# Altium PCB BMS_slave.PcbDoc (part 4 of 5)
Units mm, origin at the board's own origin, x right, y up, seen from the top; angles counter-clockwise.
Board outline 124.71 x 100.58 mm, 4 copper layers (Layer 1 - Top Layer, Layer 2 - GND, Layer 3 - Signal, Layer 4 - Bottom Layer), stack 1.56 mm thick; 370 components, 202 nets, 969 pads, 371 vias.
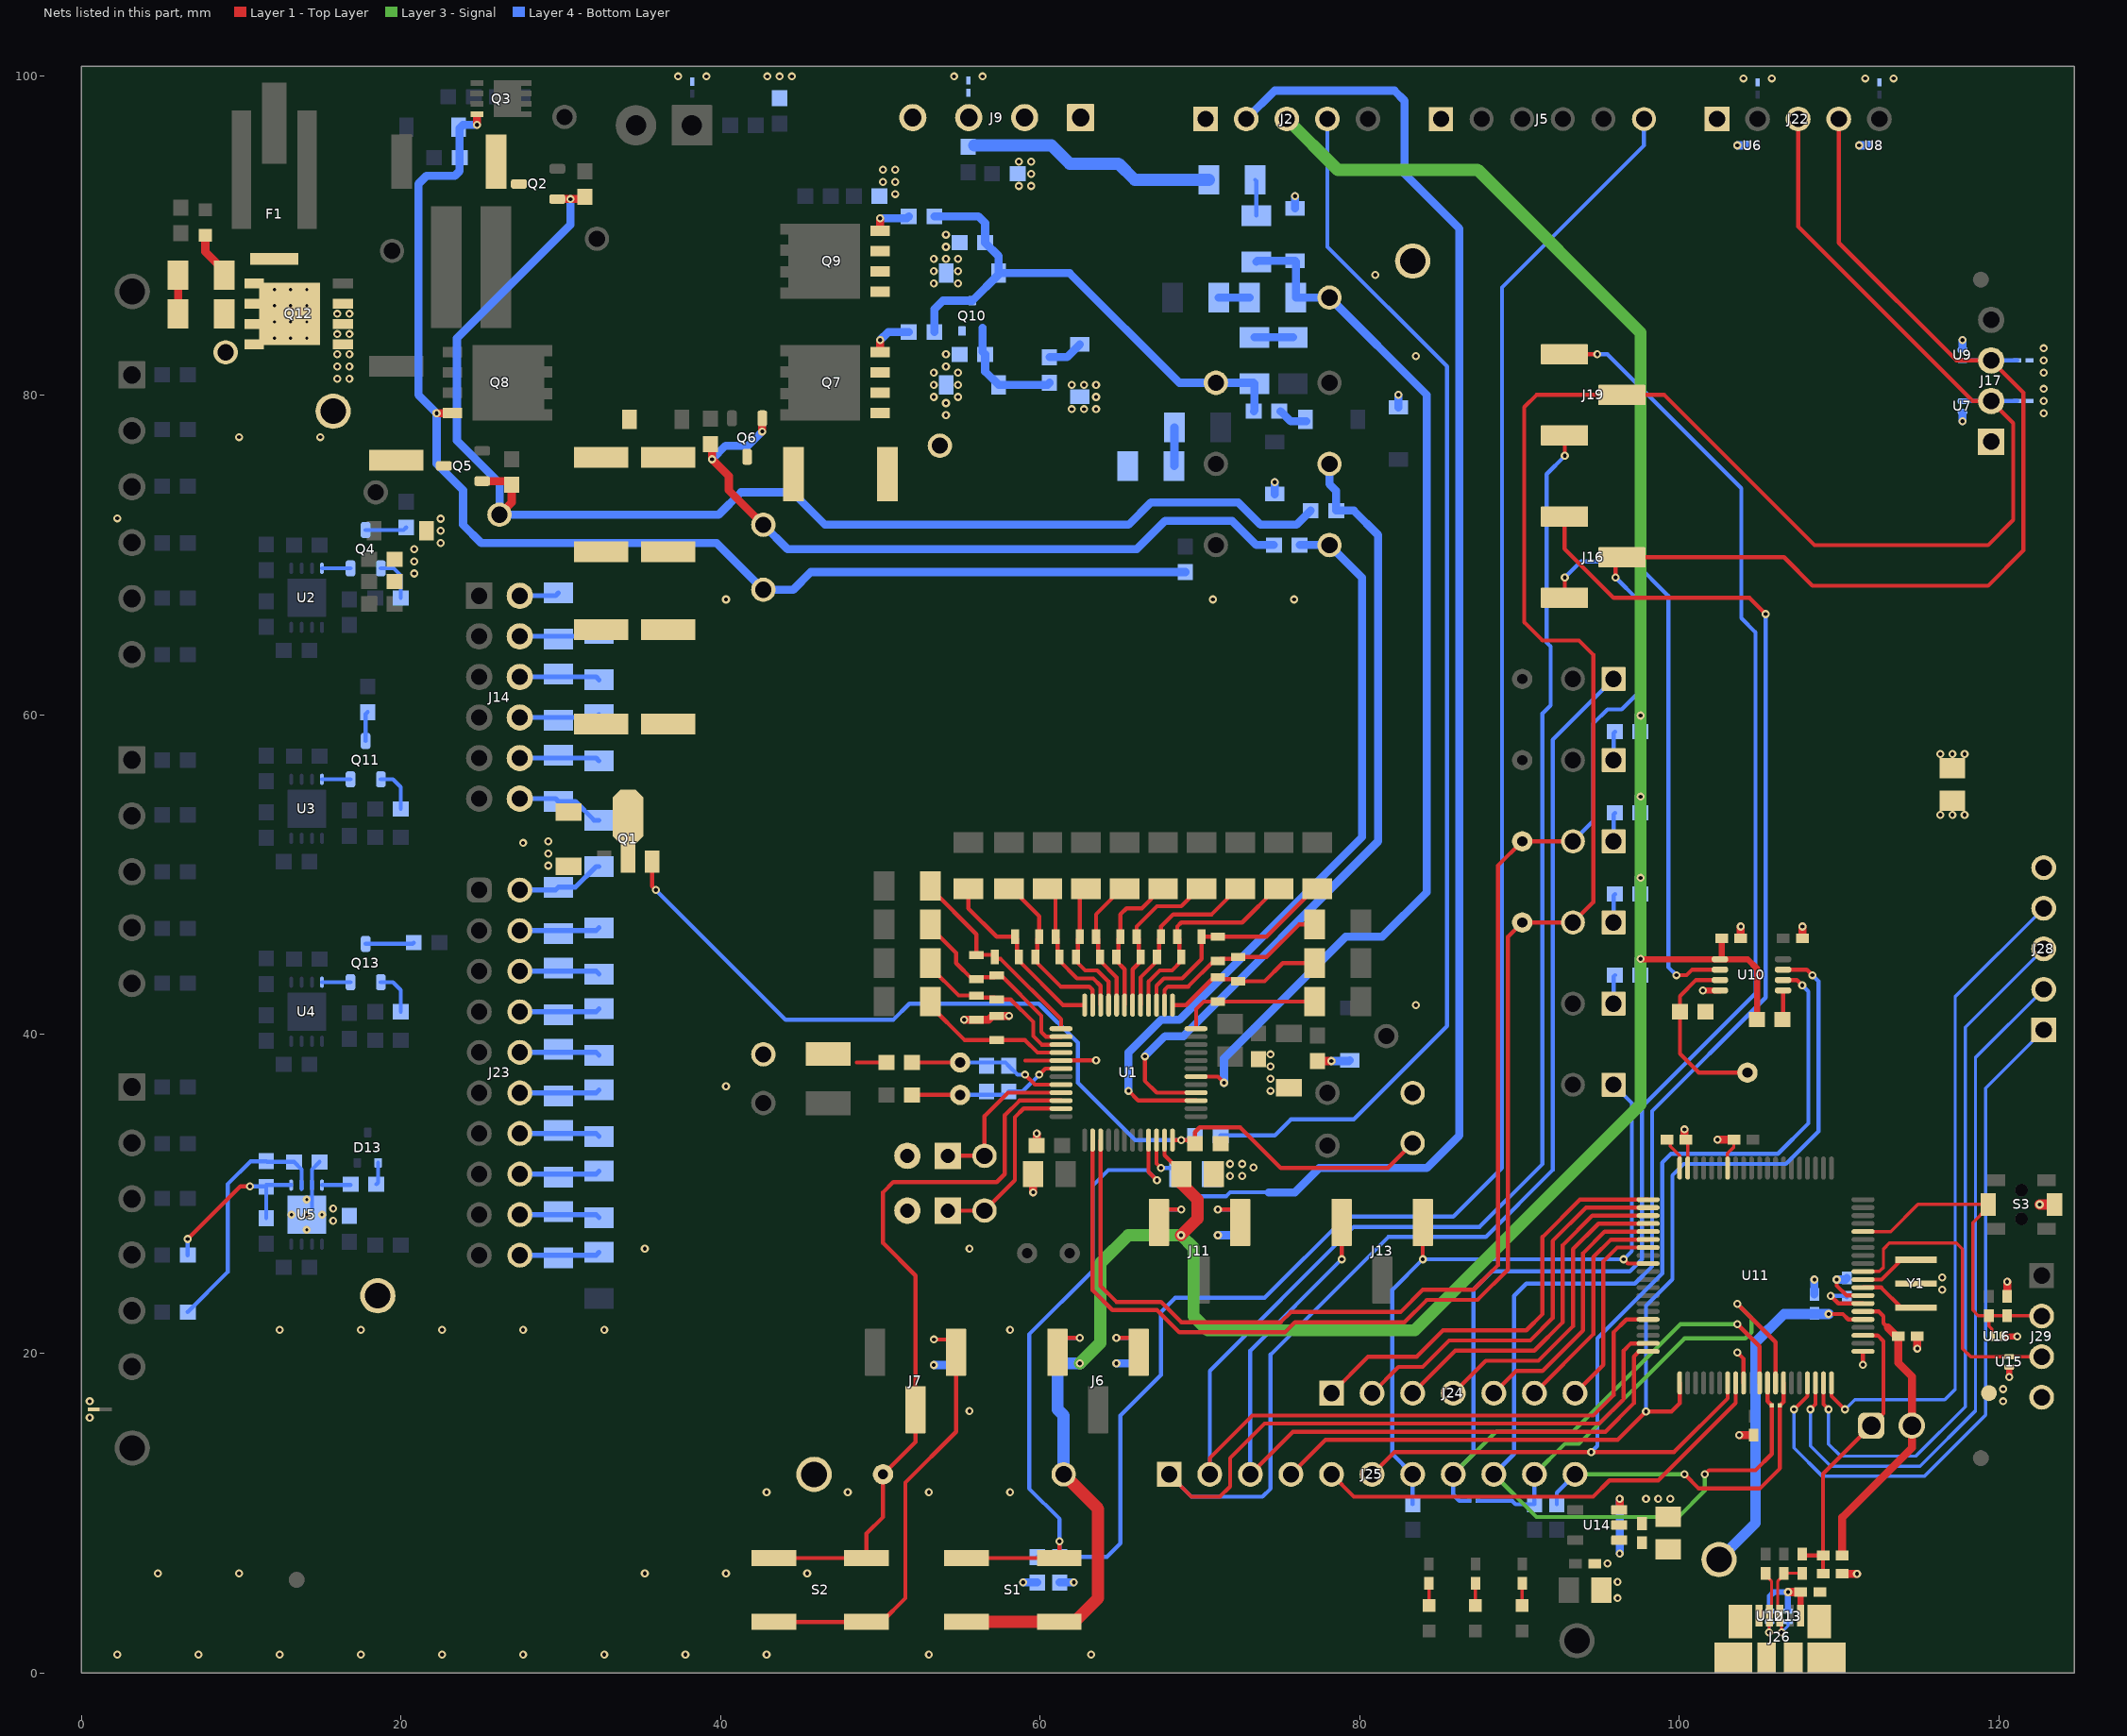
[diagram p5: the nets of this part, all layers, seen from the top]

## Via types
v1: diameter 0.508, hole 0.254, Layer 1 - Top Layer to Layer 4 - Bottom Layer, tented both sides, 339 vias
v2: diameter 0.5, hole 0.2, Layer 1 - Top Layer to Layer 4 - Bottom Layer, tented both sides, 32 vias

## Nets (pads, with @x,y where several pads share a name; then routed paths per layer and width w, separated by ;. In a path a pad name is that pad's centre, name@x,y a point inside that pad or via, vN(x,y) a via of type N, cw(c..) or ccw(c..) an arc to the next point about the centre after c; other vN are vias at no path point) (continued)
NetC55_1: C55.1 C56.2 R85.2 U5.5 | length 10.8
  Layer 1 - Top Layer w0.254: v1(6.642,27.178) 9.944,30.48 v1(10.541,30.48)
  Layer 4 - Bottom Layer w0.254: R85.2@6.642,26.162 v1(6.642,27.178) ; v1(10.541,30.48) 11.519,30.48 C56.2@11.557,30.442 C55.1@11.557,28.486 ; C56.2@11.557,30.552 U5.5@13.122,30.552
NetC56_1: C56.1 C57.2 R86.2 U5.6 | length 15.7
  Layer 4 - Bottom Layer w0.254: R86.2@6.642,22.606 9.144,25.108 9.144,30.607 10.579,32.042 C56.1@11.557,32.042 11.595,32.004 C57.2@13.297,32.004 13.772,31.529 U5.6@13.772,30.328
NetC61_1: C61.1 U11.20 | length 2.1
  Layer 1 - Top Layer w0.203: C61.1@99.222,33.401 99.441,33.182 99.441,32.973 100.025,32.389 U11.20@100.025,31.617
NetC67_1: C67.1 U11.67 | length 3.3
  Layer 1 - Top Layer w0.254: v1(109.474,23.622) 109.954,23.142 U11.67@111.5,23.142
  Layer 4 - Bottom Layer w0.254: v1(109.474,23.622) 110.398,23.622 C67.1@110.49,23.53
NetC71_1: C71.1 Q1.2 Q1.4 R9.1 R10.1
NetD1_1: D1.1 R1.2 | length 2.1
  Layer 1 - Top Layer w0.508: R1.2@77.343,38.316 v1(78.232,38.316)
  Layer 4 - Bottom Layer w0.508: v1(78.232,38.316) 79.324,38.316 D1.1@79.375,38.368
NetD2_1: D2.1 R5.2 R6.2
NetD3_1: D3.1 R45.2 | length 3
  Layer 1 - Top Layer w0.508: D3.1@7.747,90.005 7.747,88.974 8.943,87.778 R45.2@8.943,87.503
NetD4_1: D4.1 Q3.4 Q8.4 R50.2 R61.2 TP25.1 | length 78.2
  Layer 1 - Top Layer w0.508: v1(22.225,78.867) Q8.4@23.21,78.867 ; v1(24.751,96.915) Q3.4@24.751,97.485
  Layer 4 - Bottom Layer w0.508: v1(24.751,96.915) 23.876,96.915 23.66,96.698 R50.2@23.66,94.869 23.66,94.018 23.368,93.726 21.59,93.726 21.082,93.218 21.082,80.01 v1(22.225,78.867) 22.225,75.701 23.876,74.05 23.876,71.882 25.019,70.739 39.751,70.739 TP25.1@42.672,67.818 44.539,67.818 45.644,68.923 R61.2@69.088,68.923
NetD5_1: D5.1 Q10.3 R51.2 R55.2 R56.2 R64.2 R65.2 TP28.1 | length 33.9
  Layer 4 - Bottom Layer w0.508: R55.2@53.378,83.947 53.378,85.382 53.909,85.913 Q10.3@55.753,85.913 57.391,87.551 D5.1@57.391,87.63 ; R56.2@53.378,91.186 56.134,91.186 56.553,90.767 R51.2@56.553,89.535 57.391,88.698 D5.1@57.391,87.63 ; R65.2@73.368,78.994 73.406,79.032 R64.2@73.406,80.719 73.353,80.772 TP28.1@70.993,80.772 68.707,80.772 61.849,87.63 D5.1@57.391,87.63
NetD6_1: D6.1 Q10.1 R52.2 R57.1 | length 7.2
  Layer 4 - Bottom Layer w0.508: Q10.1@56.403,84.201 56.403,82.7 R52.2@56.553,82.55 56.553,81.483 D6.1@57.391,80.645 60.452,80.645 R57.1@60.579,80.772
NetD7_1: D7.1 R57.2 | length 2.2
  Layer 4 - Bottom Layer w0.508: R57.2@60.579,82.372 61.685,82.372 D7.1@62.484,83.171
NetD9_2: D9.2 R65.1 | length 1.9
  Layer 4 - Bottom Layer w0.508: R65.1@75.042,78.994 75.677,78.359 D9.2@76.669,78.359
NetD13_1: D13.1 R82.2 | length 1.4
  Layer 4 - Bottom Layer w0.254: R82.2@18.453,30.607 18.557,30.711 D13.1@18.557,31.943
NetD14_2: D14.2 R120.1 | length 1.4
  Layer 1 - Top Layer w0.203: D14.2@84.328,4.229 R120.1@84.328,5.623
NetD15_2: D15.2 R121.1 | length 1.4
  Layer 1 - Top Layer w0.203: D15.2@87.249,4.229 R121.1@87.249,5.623
NetD16_2: D16.2 R122.1 | length 1.4
  Layer 1 - Top Layer w0.203: D16.2@90.17,4.229 R122.1@90.17,5.623
NetF1_2: F1.2 Q12.5 Q12.6 Q12.7 Q12.8 Q12.9 R48.1 TP24.1
  other v2: 12.065,83.566 13.081,83.566 14.097,83.566 12.065,84.582 13.081,84.582 14.097,84.582 12.065,85.598 13.081,85.598 14.097,85.598 12.065,86.614 13.081,86.614 14.097,86.614
NetJ2_4: J2.4 R15.2 | length 76.9
  Layer 4 - Bottom Layer w0.254: R15.2@71.285,33.655 74.676,33.655 75.692,34.671 79.629,34.671 85.471,40.513 85.471,81.788 77.978,89.281 J2.4@77.978,97.282
NetJ6_1: J6.1 R25.2 | length 2.8
  Layer 1 - Top Layer w0.254: J6.1@61.087,20.866 61.214,20.993 v1(62.484,20.993)
  Layer 4 - Bottom Layer w0.254: R25.2@61.087,20.993 v1(62.484,20.993)
NetJ6_3: J6.3 R26.2 | length 2.8
  Layer 1 - Top Layer w0.254: v1(64.77,20.993) 66.04,20.993 J6.3@66.167,20.866
  Layer 4 - Bottom Layer w0.254: v1(64.77,20.993) R26.2@66.167,20.993
NetJ7_3: J7.3 R29.2 S2.1 S2.2 | length 28.7
  Layer 1 - Top Layer w0.254: S2.2@43.328,3.207 S2.1@49.128,3.207 50.07,3.207 51.562,4.699 51.562,11.938 54.737,15.113 J7.3@54.737,20.342 ; v1(53.34,20.888) 54.61,20.888 J7.3@54.737,20.761
  Layer 4 - Bottom Layer w0.254: v1(53.34,20.888) R29.2@54.737,20.888
NetJ11_1: J11.1 R89.2 | length 3.5
  Layer 1 - Top Layer w0.254: J11.1@67.437,28.216 67.437,28.889 67.564,29.016 v1(68.834,29.016)
  Layer 4 - Bottom Layer w0.254: R89.2@67.437,29.016 v1(68.834,29.016)
NetJ11_3: J11.3 R91.2 | length 2.8
  Layer 1 - Top Layer w0.254: v1(71.12,29.016) 72.39,29.016 J11.3@72.517,28.889
  Layer 4 - Bottom Layer w0.254: v1(71.12,29.016) R91.2@72.517,29.016
NetJ12_1: J12.1 R92.2 | length 1.8
  Layer 4 - Bottom Layer w0.254: J12.1@95.885,57.15 95.885,58.839 R92.2@95.974,58.928
NetJ14_2: J14.2 R87.2 | length 2.5
  Layer 4 - Bottom Layer w0.305: J14.2@27.432,67.437 29.665,67.437 R87.2@29.845,67.617
NetJ14_4: J14.4 R87.1 R88.2 | length 5
  Layer 4 - Bottom Layer w0.305: J14.4@27.432,64.897 32.205,64.897 R88.2@32.385,65.077
NetJ14_6: J14.6 R88.1 R90.2 | length 5
  Layer 4 - Bottom Layer w0.305: J14.6@27.432,62.357 32.205,62.357 R88.1@32.385,62.177
NetJ14_8: J14.8 R90.1 R93.2 | length 5
  Layer 4 - Bottom Layer w0.305: J14.8@27.432,59.817 32.205,59.817 R93.2@32.385,59.997
NetJ14_10: J14.10 R93.1 R95.2 | length 5
  Layer 4 - Bottom Layer w0.305: J14.10@27.432,57.277 32.205,57.277 R93.1@32.385,57.097
NetJ14_12: J14.12 R95.1 R96.2 | length 5.5
  Layer 4 - Bottom Layer w0.305: J14.12@27.432,54.737 29.665,54.737 R95.1@29.845,54.557 30.914,54.557 32.078,53.393 R96.2@32.385,53.393
NetJ15_1: J15.1 R94.2 | length 1.8
  Layer 4 - Bottom Layer w0.254: J15.1@95.885,52.07 95.885,53.759 R94.2@95.974,53.848
NetJ18_1: J18.1 R97.2 | length 1.8
  Layer 4 - Bottom Layer w0.254: J18.1@95.885,46.99 95.885,48.679 R97.2@95.974,48.768
NetJ20_1: J20.1 R99.2 | length 1.8
  Layer 4 - Bottom Layer w0.254: J20.1@95.885,41.91 95.885,43.599 R99.2@95.974,43.688
NetJ23_2: J23.2 R96.1 R98.2 | length 5.6
  Layer 4 - Bottom Layer w0.305: J23.2@27.432,49.022 29.665,49.022 R98.2@29.845,49.202 30.914,49.202 32.205,50.493 R96.1@32.385,50.493
NetJ23_4: J23.4 R98.1 R100.2 | length 5
  Layer 4 - Bottom Layer w0.305: J23.4@27.432,46.482 32.205,46.482 R100.2@32.385,46.662
NetJ23_6: J23.6 R100.1 R101.2 | length 5
  Layer 4 - Bottom Layer w0.305: J23.6@27.432,43.942 32.205,43.942 R100.1@32.385,43.762
NetJ23_8: J23.8 R101.1 R102.2 | length 5
  Layer 4 - Bottom Layer w0.305: J23.8@27.432,41.402 32.205,41.402 R102.2@32.385,41.582
NetJ23_10: J23.10 R102.1 R103.2 | length 5
  Layer 4 - Bottom Layer w0.305: J23.10@27.432,38.862 32.205,38.862 R102.1@32.385,38.682
NetJ23_12: J23.12 R103.1 R104.2 | length 5
  Layer 4 - Bottom Layer w0.305: J23.12@27.432,36.322 32.205,36.322 R104.2@32.385,36.502
NetJ23_14: J23.14 R104.1 R105.2 | length 5
  Layer 4 - Bottom Layer w0.305: J23.14@27.432,33.782 32.205,33.782 R104.1@32.385,33.602
NetJ23_16: J23.16 R105.1 R106.2 | length 5
  Layer 4 - Bottom Layer w0.305: J23.16@27.432,31.242 32.205,31.242 R106.2@32.385,31.422
NetJ23_18: J23.18 R106.1 R107.2 | length 5
  Layer 4 - Bottom Layer w0.305: J23.18@27.432,28.702 32.205,28.702 R106.1@32.385,28.522
NetJ23_20: J23.20 R107.1 R108.2 | length 5
  Layer 4 - Bottom Layer w0.305: J23.20@27.432,26.162 32.205,26.162 R108.2@32.385,26.342
NetJ24_1: J24.1 U11.21 | length 27.7
  Layer 1 - Top Layer w0.254: J24.1@78.232,17.526 80.518,19.812 83.566,19.812 85.217,21.463 90.424,21.463 91.44,22.479 91.44,27.305 93.777,29.642 U11.21@98.05,29.642
NetJ24_2: J24.2 U11.22 | length 24.9
  Layer 1 - Top Layer w0.254: J24.2@80.772,17.526 82.423,19.177 83.947,19.177 85.598,20.828 90.678,20.828 92.075,22.225 92.075,27.051 94.166,29.142 U11.22@98.05,29.142
NetJ24_3: J24.3 U11.23 | length 22.2
  Layer 1 - Top Layer w0.254: J24.3@83.312,17.526 85.979,20.193 90.932,20.193 92.71,21.971 92.71,26.797 94.555,28.642 U11.23@98.05,28.642
NetJ24_4: J24.4 U11.24 | length 19.4
  Layer 1 - Top Layer w0.254: J24.4@85.852,17.526 87.884,19.558 91.186,19.558 93.345,21.717 93.345,26.543 94.944,28.142 U11.24@98.05,28.142
NetJ24_5: J24.5 U11.25 | length 16.7
  Layer 1 - Top Layer w0.254: J24.5@88.392,17.526 89.789,18.923 91.44,18.923 93.98,21.463 93.98,26.289 95.333,27.642 U11.25@98.05,27.642
NetJ24_6: J24.6 U11.26 | length 13.9
  Layer 1 - Top Layer w0.254: J24.6@90.932,17.526 94.615,21.209 94.615,26.035 95.722,27.142 U11.26@98.05,27.142
NetJ24_7: J24.7 U11.27 | length 12.1
  Layer 1 - Top Layer w0.254: J24.7@93.472,17.526 95.25,19.304 95.25,25.781 96.111,26.642 U11.27@98.05,26.642
NetJ26_2: J26.2 R114.1 U12.1 | length 4.6
  Layer 1 - Top Layer w0.178: R114.1@105.41,6.258 105.41,6.121 105.766,5.766 105.766,3.719 J26.2@105.649,3.602 ; v1(105.613,2.56) J26.2@105.613,3.607
  Layer 4 - Bottom Layer w0.178: v1(105.613,2.56) 105.613,3.18 U12.1@105.664,3.231
NetJ26_3: J26.3 R115.1 R116.2 U13.1 | length 5.9
  Layer 1 - Top Layer w0.178: J26.3@106.299,3.602 106.172,3.729 106.172,5.766 106.553,6.147 R115.1@106.553,6.258 R116.2@107.696,6.258 ; v1(106.401,2.56) J26.3@106.401,3.607
  Layer 4 - Bottom Layer w0.178: v1(106.401,2.56) 106.807,2.966 U13.1@106.807,3.231
NetJ26_6: J26.6 J26.7 J26.8 J26.9 J26.10 J26.11 R117.2
NetJ28_1: J28.1 U11.57 | length 44.3
  Layer 1 - Top Layer w0.254: v1(107.187,16.51) 108.025,17.348 U11.57@108.025,18.167
  Layer 4 - Bottom Layer w0.203: v1(107.187,16.51) 107.187,14.098 108.966,12.319 115.334,12.319 119.174,16.159 119.174,36.624 J28.1@122.809,40.259
NetJ28_2: J28.2 U11.58 | length 44.5
  Layer 1 - Top Layer w0.254: v1(108.203,16.51) 108.525,16.832 U11.58@108.525,18.167
  Layer 4 - Bottom Layer w0.203: v1(108.203,16.51) 108.203,14.225 109.474,12.954 115.071,12.954 118.539,16.422 118.539,38.529 J28.2@122.809,42.799
NetJ28_3: J28.3 U11.59 | length 44.8
  Layer 1 - Top Layer w0.254: U11.59@109.025,18.167 109.025,16.832 v1(109.347,16.51)
  Layer 4 - Bottom Layer w0.203: v1(109.347,16.51) 109.347,14.351 110.109,13.589 114.808,13.589 117.904,16.685 117.904,40.434 J28.3@122.809,45.339
NetJ28_4: J28.4 U11.60 | length 41.8
  Layer 1 - Top Layer w0.254: U11.60@109.525,18.167 109.525,17.348 v1(110.363,16.51)
  Layer 4 - Bottom Layer w0.203: v1(110.363,16.51) 110.981,17.128 116.617,17.128 117.269,17.78 117.269,42.339 J28.4@122.809,47.879
NetQ2_1: Q2.1 Q5.1 R35.2 R43.2 R62.2 TP26.1 | length 83.4
  Layer 1 - Top Layer w0.508: Q5.1@25.076,74.615 26.693,74.615 R43.2@26.924,74.384 26.924,73.279 TP26.1@26.162,72.517 ; Q2.1@29.775,92.268 v1(30.594,92.268) R35.2@31.496,92.268
  Layer 4 - Bottom Layer w0.508: v1(30.594,92.268) 30.594,90.665 23.495,83.566 23.495,77.15 26.162,74.483 TP26.1@26.162,72.517 39.878,72.517 41.275,73.914 44.503,73.914 46.535,71.882 65.532,71.882 66.929,73.279 72.39,73.279 73.787,71.882 76.035,71.882 R62.2@76.924,72.771
NetQ2_3: Q2.3 R33.2
NetQ4_1: Q4.1 R38.2 | length 2.8
  Layer 4 - Bottom Layer w0.254: Q4.1@18.73,69.158 19.532,69.158 19.977,68.713 R38.2@19.977,67.31
NetQ4_2: Q4.2 U2.8 | length 1.8
  Layer 4 - Bottom Layer w0.254: U2.8@15.062,69.16 16.828,69.16 Q4.2@16.83,69.158
NetQ4_3: Q4.3 R44.1 | length 2.6
  Layer 4 - Bottom Layer w0.254: Q4.3@17.78,71.558 20.161,71.558 R44.1@20.32,71.717
NetQ5_3: Q5.3 R39.2
NetQ6_1: Q6.1 R42.2 R63.2 TP27.1 | length 45
  Layer 1 - Top Layer w0.508: R42.2@39.37,76.924 39.459,76.835 v1(39.459,75.984) 40.513,74.93 40.513,74.041 TP27.1@42.672,71.882 ; v1(42.606,77.724) Q6.1@42.606,78.543
  Layer 4 - Bottom Layer w0.508: v1(39.459,75.984) 40.31,76.835 41.717,76.835 v1(42.606,77.724) ; TP27.1@42.672,71.882 44.196,70.358 66.04,70.358 67.818,72.136 72.009,72.136 73.533,70.612 R63.2@74.625,70.612
NetQ6_3: Q6.3 R40.1
NetQ7_4: Q7.4 R55.1 | length 2.8
  Layer 1 - Top Layer w0.508: Q7.4@49.982,82.677 v1(49.982,83.439)
  Layer 4 - Bottom Layer w0.508: v1(49.982,83.439) 50.49,83.947 R55.1@51.778,83.947
NetQ9_4: Q9.4 R56.1 | length 2.6
  Layer 1 - Top Layer w0.508: Q9.4@49.982,90.297 v1(49.982,91.059)
  Layer 4 - Bottom Layer w0.508: v1(49.982,91.059) 51.651,91.059 R56.1@51.778,91.186
NetQ11_1: Q11.1 R58.2 | length 2.8
  Layer 4 - Bottom Layer w0.254: Q11.1@18.73,55.95 19.488,55.95 19.977,55.461 R58.2@19.977,54.102
NetQ11_2: Q11.2 U3.8 | length 1.8
  Layer 4 - Bottom Layer w0.254: U3.8@15.062,55.952 Q11.2@16.828,55.952
NetQ11_3: Q11.3 R60.1 | length 1.9
  Layer 4 - Bottom Layer w0.254: Q11.3@17.78,58.35 17.78,60.033 R60.1@17.907,60.16
NetQ13_1: Q13.1 R79.2 | length 2.8
  Layer 4 - Bottom Layer w0.254: Q13.1@18.73,43.25 19.488,43.25 19.977,42.761 R79.2@19.977,41.402
NetQ13_2: Q13.2 U4.8 | length 1.8
  Layer 4 - Bottom Layer w0.254: U4.8@15.062,43.252 Q13.2@16.828,43.252
NetQ13_3: Q13.3 R80.1 | length 3
  Layer 4 - Bottom Layer w0.254: Q13.3@17.78,45.65 20.72,45.65 R80.1@20.79,45.72
NetR5_1: R5.1 R9.2
NetR6_1: R6.1 R10.2
NetR45_1: R45.1 R48.2 | length 2.4
  Layer 1 - Top Layer w0.508: R48.2@6.043,85.09 R45.1@6.043,87.503
NetR64_1: R64.1 R68.2 | length 2.4
  Layer 4 - Bottom Layer w0.508: R64.1@73.406,83.619 R68.2@75.819,83.619
NetR70_1: R70.1 R71.2 | length 1.9
  Layer 4 - Bottom Layer w0.508: R71.2@71.173,86.106 R70.1@73.099,86.106
NetR73_1: R73.1 R74.2 | length 2.3
  Layer 4 - Bottom Layer w0.254: R74.2@73.459,93.472 73.533,93.398 R73.1@73.533,91.239
NetR76_1: R76.1 R77.2 | length 2.4
  Layer 4 - Bottom Layer w0.508: R77.2@68.379,75.565 68.4,75.586 R76.1@68.4,77.978
NetR82_1: R82.1 U5.8 | length 1.8
  Layer 4 - Bottom Layer w0.254: U5.8@15.062,30.552 R82.1@16.828,30.552
NetR112_2: R112.2 TP42.1 U10.3 | length 11.3
  Layer 1 - Top Layer w0.254: U10.3@102.546,43.388 101.046,43.388 100.038,42.38 100.038,38.773 101.219,37.592 TP42.1@104.267,37.592
NetR113_2: R113.2 U10.5 | length 1.8
  Layer 1 - Top Layer w0.254: R113.2@106.464,40.919 106.496,40.951 U10.5@106.496,42.738
NetRT1_1: RT1.1 TP7.1 U1.21 | length 10.2
  Layer 1 - Top Layer w0.254: RT1.1@54.229,32.385 TP7.1@56.515,32.385 56.515,34.868 57.989,36.342 U1.21@61.307,36.342
NetRT2_1: RT2.1 TP8.1 U1.23 | length 12
  Layer 1 - Top Layer w0.254: RT2.1@54.229,28.956 TP8.1@56.515,28.956 58.42,30.861 58.42,34.798 58.964,35.342 U1.23@61.307,35.342
NetU11_69: U11.69 Y1.1 | length 3.4
  Layer 1 - Top Layer w0.254: U11.69@111.5,24.142 112.637,24.142 113.895,22.884 Y1.1@114.427,22.884
NetU11_70: U11.70 Y1.3 | length 3.4
  Layer 1 - Top Layer w0.254: U11.70@111.5,24.642 112.653,24.642 113.895,25.884 Y1.3@114.427,25.884
P4_2: J25.6 U10.6 U11.47 | length 65.4
  Layer 1 - Top Layer w0.254: J25.6@80.772,12.446 82.169,13.843 v1(94.488,13.843) 99.668,13.843 103.025,17.2 U11.47@103.025,18.167 ; U10.6@106.496,43.388 107.361,43.388 v1(107.696,43.053)
  Layer 4 - Bottom Layer w0.254: v1(94.488,13.843) 94.869,14.224 94.869,20.961 98.933,25.025 98.933,31.957 99.488,32.512 106.172,32.512 108.077,34.417 108.077,42.672 v1(107.696,43.053)
P4_3: J25.5 U11.48 | length 29.6
  Layer 1 - Top Layer w0.254: J25.5@78.232,12.446 79.629,11.049 94.608,11.049 95.624,12.065 98.679,12.065 103.525,16.911 U11.48@103.525,18.167
PACK: D11.1 R70.2 R73.2 TP33.1 U1.42 | length 67
  Layer 1 - Top Layer w0.254: U1.42@69.757,37.342 71.116,37.342 v1(71.501,36.957)
  Layer 4 - Bottom Layer w0.508: v1(71.501,36.957) 71.501,38.481 79.121,46.101 81.407,46.101 84.201,48.895 84.201,80.01 TP33.1@78.105,86.106 R70.2@75.999,86.106 75.999,88.353 D11.1@75.946,88.406 73.599,88.406 R73.2@73.533,88.339
PACK+: C38.1 C42.1 D5.2 D6.2 E2.1 J9.3 J9.4 Q7.1 Q7.2 Q7.3 Q9.1 Q9.2 Q9.3 Q10.2 R40.2 R51.1 R52.1 R74.1 R77.1 TP22.1 | length 15.6
  Layer 4 - Bottom Layer w0.762: C42.1@55.88,95.631 60.706,95.631 61.849,94.488 64.897,94.488 65.913,93.472 R74.1@70.559,93.472
  other v1: 54.102,78.74 54.102,79.502 53.34,79.883 54.864,79.883 53.34,80.645 54.864,80.645 53.34,81.407 54.864,81.407 54.102,81.788 54.102,82.55 53.34,86.995 54.864,86.995 53.34,87.757 54.864,87.757 53.34,88.519 54.102,88.519 54.864,88.519 54.102,89.281 54.102,90.043 50.927,92.583 50.165,93.345 50.927,93.345 50.165,94.107 50.927,94.107
PCHG: R62.1 TP31.1 U1.40 | length 50.8
  Layer 1 - Top Layer w0.254: v1(66.548,38.608) 66.548,37.084 67.29,36.342 U1.40@69.757,36.342
  Layer 4 - Bottom Layer w0.508: v1(66.548,38.608) 67.818,39.878 68.961,39.878 81.153,52.07 81.153,71.247 79.629,72.771 R62.1@78.524,72.771 78.524,74.003 78.105,74.422 TP31.1@78.105,75.692
PDSG: R63.1 TP32.1 U1.39 | length 48.1
  Layer 1 - Top Layer w0.254: v1(65.532,36.449) 66.139,35.842 U1.39@69.757,35.842
  Layer 4 - Bottom Layer w0.508: v1(65.532,36.449) 65.532,38.862 67.564,40.894 68.707,40.894 80.137,52.324 80.137,68.58 TP32.1@78.105,70.612 R63.1@76.238,70.612
PGND: C36.2 C45.2 D7.2 E1.2 E2.2 E3.2 E4.2 E5.2 E6.2 J9.1 J9.2 J17.1 J22.1 NT5.2 R28.1 R30.1 TP36.1 U6.2 U7.2 U8.2 U9.2 | length 3.9
  Layer 1 - Top Layer w0.254: 48.514,38.227 R28.1@50.381,38.227
  Layer 4 - Bottom Layer w0.508: v1(103.632,95.631) U6.2@104.14,95.631 ; v1(111.252,95.631) U8.2@111.76,95.631 ; v1(117.729,78.359) U7.2@117.729,78.867 ; U9.2@117.729,82.931 v1(117.729,83.439)
  other v1: 116.332,57.531 117.094,57.531 117.856,57.531 122.809,78.867 61.976,79.121 62.738,79.121 63.5,79.121 122.809,79.629 63.5,79.883 122.809,80.391 61.976,80.645 62.738,80.645 63.5,80.645 122.809,81.407 122.809,82.169 122.809,82.931 58.674,93.091 59.436,93.091 59.436,93.853 58.674,94.615 59.436,94.615 104.013,99.822 105.791,99.822 111.633,99.822 113.411,99.822 37.338,99.949 39.116,99.949 42.926,99.949 43.688,99.949 44.45,99.949 54.61,99.949 56.388,99.949
PUR: J27.1 R116.1 R118.2 R119.1 U11.63 | length 18.8
  Layer 1 - Top Layer w0.254: R116.1@107.788,7.366 R119.1@109.001,7.366 ; R118.2@109.001,6.223 R119.1@109.001,7.366 ; U11.63@111.5,21.142 112.415,21.142 112.776,20.781 112.776,16.256 109.001,12.481 R119.1@109.001,7.366
QGND: C58.1 C59.1 C60.2 C61.2 C62.2 C63.2 C64.2 C65.2 C66.2 C67.2 C68.2 C69.2 C70.2 J26.5 J28.5 J29.4 NT5.1 R112.1 R117.1 R118.1 S3.1 TP45.1 U10.4 U11.14 U11.19 U11.49 U11.61 U11.68 U12.2 U13.2 U14.2 U15.2 U16.2 Y1.2 | length 26.1
  Layer 1 - Top Layer w0.203: C61.2@100.422,33.401 100.525,33.298 U11.19@100.525,31.617 ; U11.14@103.025,31.617 103.025,32.54 103.413,32.928 C69.2@103.413,33.401
  Layer 1 - Top Layer w0.254: v1(103.632,20.066) 104.025,19.673 U11.49@104.025,18.167 ; v1(109.855,24.638) 109.855,24.257 110.47,23.642 U11.68@111.5,23.642 ; v1(111.5,19.304) U11.61@111.5,20.142
  Layer 1 - Top Layer w0.381: v1(101.473,42.738) U10.4@102.546,42.738 ; J26.5@107.599,3.602 107.599,5.075 R117.1@107.604,5.08 ; U16.2@120.388,21.082 v1(121.158,21.082) ; v1(120.65,18.542) U15.2@120.65,19.05
  Layer 1 - Top Layer w0.508: v1(100.33,34.036) 100.33,33.493 C61.2@100.422,33.401 ; v1(102.397,33.401) C69.2@103.413,33.401 ; v1(103.759,14.894) C68.2@104.648,14.894 ; C58.1@103.851,45.999 v1(103.851,46.736) ; v1(106.807,5.08) R117.1@107.604,5.08 ; C59.1@107.712,45.999 v1(107.712,46.736) ; R118.1@110.201,6.223 v1(111.125,6.223) ; v1(114.9,20.32) C60.2@114.9,21.082 ; C70.2@120.523,23.587 v1(120.523,24.511)
  Layer 1 - Top Layer w0.635: v1(122.555,29.337) S3.1@123.487,29.337
  Layer 4 - Bottom Layer w0.381: U12.2@105.664,3.937 105.664,4.826 105.918,5.08 v1(106.807,5.08) U13.2@106.807,3.937
  Layer 4 - Bottom Layer w0.508: C66.2@108.458,23.714 v1(108.458,24.638) ; v1(109.855,24.638) 110.398,24.638 C67.2@110.49,24.73
  other v1: 96.139,4.699 96.139,5.715 95.504,6.858 97.917,10.922 98.679,10.922 99.441,10.922 120.269,17.018 120.269,17.78 116.459,24.003 116.459,24.765 116.332,53.721 117.094,53.721 117.856,53.721
REG1: C12.2 C58.2 J2.3 R25.1 R89.1 R92.1 R94.1 R97.1 R99.1 R113.1 S1.3 S1.4 TP6.1 U1.35 U10.1 | length 178.9
  Layer 1 - Top Layer w0.254: U1.35@67.782,33.367 67.782,32.421 68.848,31.355 C12.2@68.848,30.644 ; v1(97.574,44.704) v1@97.59,44.688 ; U10.1@102.546,44.688 U10.1@102.651,44.793
  Layer 1 - Top Layer w0.381: v1@97.59,44.688 U10.1@102.546,44.688 104.283,44.688 104.864,44.107 R113.1@104.864,40.919 ; U10.1@102.651,44.793 C58.2@102.651,45.999
  Layer 1 - Top Layer w0.762: S1.3@55.393,3.207 S1.4@61.193,3.207 62.135,3.207 63.627,4.699 63.627,10.287 TP6.1@61.468,12.446 ; v1(68.818,27.416) 69.85,28.448 69.85,29.642 C12.2@68.848,30.644
  Layer 3 - Signal w0.762: v1(62.484,19.393) 63.754,20.663 63.754,25.654 65.516,27.416 v1(68.818,27.416) 69.596,26.638 69.596,22.352 70.485,21.463 83.439,21.463 97.574,35.598 v1(97.574,44.704) v1(97.574,49.784) v1(97.574,54.864) v1(97.574,59.944) 97.574,83.909 87.376,94.107 78.613,94.107 J2.3@75.438,97.282
  Layer 4 - Bottom Layer w0.762: TP6.1@61.468,12.446 61.468,16.129 61.087,16.51 R25.1@61.087,19.393 v1(62.484,19.393) ; R89.1@67.437,27.416 v1(68.818,27.416) ; R99.1@97.574,43.688 v1(97.574,44.704) ; R97.1@97.574,48.768 v1(97.574,49.784) ; R94.1@97.574,53.848 v1(97.574,54.864) ; R92.1@97.574,58.928 v1(97.574,59.944)
REG2: C15.2 J2.2 U1.34 | length 100.2
  Layer 1 - Top Layer w0.254: U1.34@67.282,33.367 67.282,31.905 v1(67.564,31.623)
  Layer 4 - Bottom Layer w0.254: v1(67.564,31.623) 68.58,31.623 68.58,31.115 69.85,29.845 71.628,29.845 71.882,30.099 74.295,30.099
  Layer 4 - Bottom Layer w0.508: J2.2@72.898,97.282 74.676,99.06 82.169,99.06 82.804,98.425 82.804,93.853 86.233,90.424 86.233,33.655 84.201,31.623 77.47,31.623 75.946,30.099 74.295,30.099
REGIN: C13.2 Q1.3 R15.1 TP5.1 U1.36 | length 62.4
  Layer 1 - Top Layer w0.254: Q1.3@35.827,50.927 Q1.3@35.705,50.805 35.705,49.258 v1(35.941,49.022) ; U1.36@68.282,33.367 v1(68.834,33.367) 69.465,33.367 C13.2@69.685,33.147 69.685,33.871 69.977,34.163 72.517,34.163 75.057,31.623 81.756,31.623 TP5.1@83.312,33.179
  Layer 4 - Bottom Layer w0.254: v1(35.941,49.022) 44.069,40.894 50.8,40.894 51.816,41.91 59.91,41.91 62.357,39.463 62.357,36.957 65.947,33.367 v1(68.834,33.367) 69.397,33.367 R15.1@69.685,33.655
RST: C70.1 J29.2 R123.1 S3.2 U11.76 U16.1 | length 21.4
  Layer 1 - Top Layer w0.203: U11.76@111.5,27.642 113.24,27.642 114.935,29.337 S3.2@119.337,29.337 119.337,29.167 118.364,28.194 118.364,22.733 118.71,22.387 R123.1@119.38,22.387 ; U16.1@119.563,21.082 119.563,21.542 119.388,21.717 119.388,22.379 R123.1@119.38,22.387 ; J29.2@122.647,22.387 R123.1@119.38,22.387
RST_SHUT: C20.1 J5.6 R20.1 S1.1 S1.2 U1.33 | length 155.5
  Layer 1 - Top Layer w0.254: S1.1@55.393,7.207 S1.2@61.193,7.207 61.214,7.228 v1(61.214,8.255) ; U1.33@66.782,33.367 66.782,31.389 v1(67.31,30.861)
  Layer 4 - Bottom Layer w0.254: R20.1@59.817,7.277 C20.1@61.214,7.277 ; v1(67.31,30.861) 66.675,31.496 64.262,31.496 63.282,30.516 63.282,25.182 59.309,21.209 59.309,11.557 61.214,9.652 C20.1@61.214,7.277 ; J5.6@97.79,97.282 97.79,95.631 88.9,86.741 88.9,31.623 85.852,28.575 79.121,28.575 74.041,23.495 68.453,23.495 67.564,22.606 67.564,18.669 65.024,16.129 65.024,8.128 64.173,7.277 C20.1@61.214,7.277
SCL: E4.1 J17.2 J18.2 J19.2 J22.3 TP40.1 U1.26 U7.1 | length 169.5
  Layer 1 - Top Layer w0.254: U1.26@63.282,33.367 63.282,23.967 64.516,22.733 67.31,22.733 68.707,21.336 75.311,21.336 75.946,21.971 82.804,21.971 84.201,23.368 87.376,23.368 89.281,25.273 89.281,46.101 TP40.1@90.17,46.99 J18.2@93.345,46.99 94.615,48.26 94.615,63.754 93.726,64.643 91.44,64.643 90.297,65.786 90.297,79.248 91.059,80.01 99.06,80.01 108.458,70.612 119.327,70.612 120.904,72.189 120.904,78.247 J17.2@119.522,79.629 118.364,79.629 107.442,90.551 J22.3@107.442,97.282
  Layer 4 - Bottom Layer w0.254: U7.1@117.729,79.629 J17.2@119.522,79.629 E4.1@121.158,79.629
SCL2: J19.3 J25.8 NT3.1 U11.51 | length 117.9
  Layer 1 - Top Layer w0.254: J19.3@92.815,82.55 v1(94.869,82.55) ; v1(103.632,21.844) 105.025,20.451 U11.51@105.025,18.167
  Layer 3 - Signal w0.254: J25.8@85.852,12.446 88.519,15.113 93.345,15.113 100.076,21.844 v1(103.632,21.844)
  Layer 4 - Bottom Layer w0.254: NT3.1@86.868,10.795 86.233,10.795 85.852,11.176 J25.8@85.852,12.446 87.122,13.716 87.122,24.003 88.265,25.146 96.901,25.146 97.663,25.908 97.663,35.442 104.775,42.554 104.775,65.151 103.886,66.04 103.886,74.168 95.504,82.55 v1(94.869,82.55)
SDA: E6.1 J15.2 J16.2 J17.3 J22.4 TP39.1 U1.27 U9.1 | length 151.3
  Layer 1 - Top Layer w0.254: U1.27@63.782,33.367 63.782,24.229 64.77,23.241 67.564,23.241 68.834,21.971 75.057,21.971 75.692,22.606 82.55,22.606 83.947,24.003 87.122,24.003 88.646,25.527 88.646,50.546 TP39.1@90.17,52.07 J15.2@93.345,52.07 ; J16.2@95.885,69.85 106.553,69.85 108.331,68.072 119.327,68.072 121.539,70.284 121.539,80.152 J17.3@119.522,82.169 117.348,82.169 109.982,89.535 J22.4@109.982,97.282 ; v1(96.012,68.58) 96.012,69.447 J16.2@96.415,69.85
  Layer 4 - Bottom Layer w0.254: J15.2@93.345,52.07 94.615,53.34 94.615,59.436 95.504,60.325 96.393,60.325 97.409,61.341 97.409,67.183 v1(96.012,68.58) ; U9.1@117.729,82.169 J17.3@119.522,82.169 E6.1@121.158,82.169
SDA2: J16.3 J25.9 NT4.1 U11.52 | length 106.5
  Layer 1 - Top Layer w0.254: J16.3@92.815,72.39 92.815,70.38 95.885,67.31 104.394,67.31 v1(105.41,66.294) ; v1(101.6,12.446) 101.854,12.7 104.775,12.7 105.791,13.716 NT4.1@105.791,16.764 105.525,17.03 U11.52@105.525,18.167
  Layer 3 - Signal w0.254: J25.9@88.392,12.446 91.059,9.779 99.949,9.779 101.6,11.43 v1(101.6,12.446)
  Layer 4 - Bottom Layer w0.254: J25.9@88.392,12.446 89.662,13.716 89.662,23.622 90.424,24.384 97.217,24.384 98.298,25.465 98.298,35.179 105.41,42.291 v1(105.41,66.294)
SMBC1: J25.10 NT3.2 R110.2 U11.53 | length 30.9
  Layer 1 - Top Layer w0.254: v1(103.632,23.114) 106.025,20.721 U11.53@106.025,18.167
  Layer 3 - Signal w0.254: J25.10@90.932,12.446 92.837,14.351 93.726,14.351 100.33,20.955 104.14,20.955 104.521,21.336 104.521,22.225 v1(103.632,23.114)
  Layer 4 - Bottom Layer w0.254: NT3.2@87.376,10.795 89.535,10.795 89.751,10.579 R110.2@90.932,10.579 J25.10@90.932,12.446
SMBD1: J25.11 NT4.2 R109.2 U11.54 | length 21.5
  Layer 1 - Top Layer w0.254: v1(100.33,12.446) 101.219,11.557 105.029,11.557 106.299,12.827 NT4.2@106.299,16.764 106.525,16.99 U11.54@106.525,18.167
  Layer 3 - Signal w0.254: J25.11@93.472,12.446 v1(100.33,12.446)
  Layer 4 - Bottom Layer w0.254: R109.2@92.329,10.579 92.329,11.303 J25.11@93.472,12.446
SRN: C27.1 C28.2 R28.2 TP13.1 U1.20 | length 9.9
  Layer 1 - Top Layer w0.254: R28.2@51.981,38.227 TP13.1@54.991,38.227 ; v1(59.055,37.465) 59.678,36.842 U1.20@61.307,36.842
  Layer 4 - Bottom Layer w0.254: TP13.1@54.991,38.227 57.823,38.227 C27.1@58.039,38.011 58.585,37.465 v1(59.055,37.465)
SRP: C27.2 C28.1 R27.2 TP12.1 U1.18 | length 10
  Layer 1 - Top Layer w0.254: R27.2@51.981,36.195 TP12.1@54.991,36.195 ; v1(59.944,37.465) 60.321,37.842 U1.18@61.307,37.842
  Layer 4 - Bottom Layer w0.254: TP12.1@54.991,36.195 57.823,36.195 C27.2@58.039,36.411 58.89,36.411 v1(59.944,37.465)
TEST: J29.3 U11.71 U15.1 | length 19.2
  Layer 1 - Top Layer w0.203: U11.71@111.5,25.142 112.518,25.142 112.776,25.4 112.776,26.543 113.157,26.924 117.348,26.924 117.729,26.543 117.729,20.32 118.245,19.804 U15.1@120.777,19.804 ; U15.1@120.785,19.812 J29.3@122.682,19.812
TS2: J7.2 S2.3 S2.4 TP11.1 U1.22 | length 46.5
  Layer 1 - Top Layer w0.254: S2.4@43.328,7.207 S2.3@49.128,7.207 49.128,8.742 50.165,9.779 TP11.1@50.165,12.446 52.197,14.478 J7.2@52.197,16.488 52.197,24.892 50.165,26.924 50.165,30.099 50.8,30.734 57.277,30.734 57.785,31.242 57.785,34.925 58.702,35.842 U1.22@61.307,35.842
uC_HDQ: J13.3 J21.1 J25.7 R111.2 U11.29 | length 44.8
  Layer 1 - Top Layer w0.254: v1(83.947,25.908) J13.3@83.947,28.216 ; v1(96.52,25.908) 96.786,25.642 U11.29@98.05,25.642
  Layer 4 - Bottom Layer w0.254: R111.2@83.312,10.579 J25.7@83.312,12.446 82.042,13.716 82.042,24.003 v1(83.947,25.908) v1(96.52,25.908) 97.028,26.416 97.028,35.687 J21.1@95.885,36.83
uC_SPI_CLK: J19.1 J25.2 U11.36 | length 113.4
  Layer 1 - Top Layer w0.254: J25.2@70.612,12.446 70.612,13.462 73.279,16.129 94.615,16.129 95.885,17.399 95.885,21.336 96.691,22.142 U11.36@98.05,22.142 ; J19.1@92.815,77.47 92.837,77.448 v1(92.837,76.2)
  Layer 4 - Bottom Layer w0.254: J25.2@70.612,12.446 70.612,18.923 79.629,27.94 87.503,27.94 91.44,31.877 91.44,60.071 91.948,60.579 91.948,64.262 91.694,64.516 91.694,75.057 v1(92.837,76.2)
uC_SPI_CS: J10.1 J25.1 U11.39 | length 107.6
  Layer 1 - Top Layer w0.254: J25.1@68.072,12.446 69.469,11.049 71.247,11.049 71.882,11.684 71.882,13.462 74.041,15.621 94.996,15.621 96.52,17.145 96.52,20.193 96.969,20.642 U11.39@98.05,20.642
  Layer 4 - Bottom Layer w0.254: J25.1@68.072,12.446 69.469,11.049 73.914,11.049 74.422,11.557 74.422,19.946 81.781,27.305 87.884,27.305 92.075,31.496 92.075,58.42 J10.1@95.885,62.23
uC_SPI_MISO_A: J16.1 U10.2 | length 35.9
  Layer 1 - Top Layer w0.254: J16.1@92.815,67.31 92.837,67.332 v1(92.837,68.58) ; v1(99.822,43.688) 100.457,43.688 100.807,44.038 U10.2@102.546,44.038
  Layer 4 - Bottom Layer w0.254: v1(92.837,68.58) 93.853,69.596 97.155,69.596 99.314,67.437 99.314,44.196 v1(99.822,43.688)
uC_SPI_MISO_B: J25.4 U10.7 U11.41 | length 65.1
  Layer 1 - Top Layer w0.254: J25.4@75.692,12.446 77.851,14.605 96.139,14.605 v1(97.917,16.383) 99.517,16.383 100.025,16.891 U11.41@100.025,18.167 ; U10.7@106.496,44.038 107.981,44.038 v1(108.331,43.688)
  Layer 4 - Bottom Layer w0.254: v1(97.917,16.383) 97.917,22.999 99.568,24.65 99.568,31.16 100.285,31.877 106.68,31.877 108.712,33.909 108.712,43.307 v1(108.331,43.688)
uC_SPI_MOSI: J13.1 J25.3 U11.40 | length 47.9
  Layer 1 - Top Layer w0.254: J25.3@73.152,12.446 75.819,15.113 95.377,15.113 97.155,16.891 97.155,19.812 97.485,20.142 U11.40@98.05,20.142 ; v1(78.867,25.908) J13.1@78.867,28.216
  Layer 4 - Bottom Layer w0.254: J25.3@73.152,12.446 73.152,20.193 v1(78.867,25.908)
VBUS: C62.1 C63.1 C66.1 J26.1 TP43.1 U11.65 U14.1 U14.3 | length 26.3
  Layer 1 - Top Layer w0.254: v1(109.347,22.479) 110.236,22.479 110.573,22.142 U11.65@111.5,22.142
  Layer 1 - Top Layer w0.508: U14.3@96.244,10.221 96.266,10.243 v1(96.266,10.922)
  Layer 4 - Bottom Layer w0.508: v1(96.266,7.493) v1(96.266,10.922)
  Layer 4 - Bottom Layer w0.635: TP43.1@102.489,7.112 104.775,9.398 104.775,20.701 106.553,22.479 v1(109.347,22.479)
VC0: C23.1 R24.2 U1.16 | length 9.7
  Layer 1 - Top Layer w0.254: R24.2@53.139,42.037 53.139,41.762 55.277,39.624 C23.1@57.277,39.624 59.055,39.624 59.837,38.842 U1.16@61.307,38.842
VC1: C22.2 C24.1 R23.2 U1.15 | length 10.8
  Layer 1 - Top Layer w0.254: R23.2@53.139,44.45 53.139,44.175 54.896,42.418 C24.1@56.007,42.418 56.134,42.291 C22.2@57.15,42.291 ; C22.2@57.277,42.164 58.166,42.164 59.563,40.767 59.563,39.878 60.099,39.342 U1.15@61.307,39.342
VC2: C21.2 C22.1 R22.2 U1.14 | length 12.2
  Layer 1 - Top Layer w0.254: R22.2@53.139,46.863 53.139,46.683 54.737,45.085 54.737,44.45 55.753,43.434 C21.2@56.007,43.434 56.134,43.561 C22.1@57.15,43.561 ; C22.1@57.277,43.688 57.539,43.688 60.071,41.156 60.071,40.132 60.361,39.842 U1.14@61.307,39.842
VC3: C19.2 C21.1 R21.2 U1.13 | length 13.1
  Layer 1 - Top Layer w0.254: R21.2@53.139,49.276 53.139,49.121 56.007,46.253 C21.1@56.007,44.958 57.023,44.958 C19.2@57.15,44.831 57.277,44.704 57.531,44.704 61.307,40.928 U1.13@61.307,40.342
VC4: C18.2 C19.1 R19.2 U1.12 | length 11.6
  Layer 1 - Top Layer w0.254: R19.2@55.499,49.096 55.499,47.879 57.277,46.101 C18.2@58.42,46.101 58.547,45.974 C19.1@58.547,44.958 ; C19.1@58.674,44.831 58.674,44.577 61.434,41.817 U1.12@62.782,41.817
VC5: C17.2 C18.1 R18.2 U1.11 | length 10.6
  Layer 1 - Top Layer w0.254: R18.2@58.039,49.096 58.219,49.096 59.944,47.371 C18.1@59.944,46.101 59.817,45.974 C17.2@59.817,44.958 ; C17.2@59.69,44.831 59.69,44.577 61.29,42.977 63.068,42.977 63.282,42.763 U1.11@63.282,41.817
VC6: C16.2 C17.1 R17.2 U1.10 | length 9.1
  Layer 1 - Top Layer w0.254: R17.2@60.452,49.096 60.96,48.588 C16.2@60.96,46.101 61.087,45.974 C17.1@61.087,44.958 ; C17.1@61.214,44.831 61.214,44.577 62.306,43.485 63.322,43.485 63.782,43.025 U1.10@63.782,41.817
VC7: C14.2 C16.1 R16.2 U1.9 | length 8.7
  Layer 1 - Top Layer w0.254: C14.2@62.23,44.831 62.23,44.577 62.814,43.993 63.576,43.993 64.282,43.287 U1.9@64.282,41.817 ; C14.2@62.357,44.958 62.357,45.974 C16.1@62.484,46.101 62.484,48.715 R16.2@62.865,49.096
VC8: C11.2 C14.1 R14.2 U1.8 | length 8.5
  Layer 1 - Top Layer w0.254: C14.1@63.627,44.958 63.627,45.974 C11.2@63.5,46.101 63.5,47.498 65.098,49.096 R14.2@65.278,49.096 ; C14.1@63.754,44.831 63.754,44.577 64.782,43.549 U1.8@64.782,41.817
VC9: C10.2 C11.1 R13.2 U1.7 | length 9.1
  Layer 1 - Top Layer w0.254: C10.2@64.77,44.831 64.77,44.577 65.282,44.065 U1.7@65.282,41.817 ; C10.2@64.897,44.958 64.897,45.974 C11.1@65.024,46.101 65.024,47.498 65.405,47.879 66.358,47.879 67.575,49.096 R13.2@67.691,49.096
VC10: C9.2 C10.1 R12.2 U1.6 | length 10.1
  Layer 1 - Top Layer w0.254: U1.6@65.782,41.817 65.782,44.057 66.294,44.569 C10.1@66.294,44.831 ; C10.1@66.167,44.958 66.167,45.974 C9.2@66.04,46.101 66.04,46.736 67.31,48.006 68.834,48.006 69.924,49.096 R12.2@70.104,49.096
VC11: C8.2 C9.1 R11.2 U1.5 | length 11.2
  Layer 1 - Top Layer w0.254: U1.5@66.282,41.817 66.282,43.549 67.31,44.577 C8.2@67.31,44.831 ; C8.2@67.437,44.958 67.437,45.974 C9.1@67.564,46.101 67.564,46.736 68.326,47.498 70.739,47.498 72.337,49.096 R11.2@72.517,49.096
VC12: C7.2 C8.1 R8.2 U1.4 | length 13.5
  Layer 1 - Top Layer w0.254: U1.4@66.782,41.817 66.782,43.287 67.488,43.993 68.25,43.993 68.834,44.577 C8.1@68.834,44.831 ; C8.1@68.707,44.958 68.707,45.974 C7.2@68.58,46.101 68.58,46.736 68.834,46.99 72.644,46.99 74.75,49.096 R8.2@74.93,49.096
VC13: C6.2 C7.1 R7.2 U1.3 | length 14.6
  Layer 1 - Top Layer w0.254: U1.3@67.282,41.817 67.282,43.025 67.742,43.485 68.885,43.485 70.104,44.704 C7.1@70.104,46.101 C6.2@71.12,46.101 74.168,46.101 77.163,49.096 R7.2@77.343,49.096
VC14: C5.2 C6.1 R4.2 U1.2 | length 11.8
  Layer 1 - Top Layer w0.254: U1.2@67.782,41.817 67.782,42.763 67.996,42.977 69.266,42.977 70.866,44.577 C6.1@71.12,44.577 ; C6.1@71.247,44.704 72.263,44.704 C5.2@72.39,44.831 74.168,44.831 76.2,46.863 R4.2@77.163,46.863
VC15: C4.2 C5.1 R3.2 U1.1 | length 10
  Layer 1 - Top Layer w0.254: U1.1@68.282,41.817 69.122,41.817 70.866,43.561 C4.2@71.12,43.561 ; C4.2@71.247,43.434 72.263,43.434 C5.1@72.39,43.307 74.041,43.307 75.184,44.45 R3.2@77.163,44.45
VC16: C4.1 R2.2 U1.48 | length 8.8
  Layer 1 - Top Layer w0.254: U1.48@69.757,40.342 69.757,41.563 70.231,42.037 C4.1@71.12,42.037 R2.2@77.163,42.037
VSS: C1.2 C2.2 C12.1 C13.1 C15.1 C20.2 C23.2 C24.2 C25.1 C26.2 C47.1 C54.1 C57.1 C71.2 D8.2 D10.2 D11.2 D12.2 J2.1 J5.1 NT1.1 Q12.1 Q12.2 Q12.3 R20.2 R26.1 R29.1 R66.1 R91.1 RT1.2 RT2.2 TP14.1 TP15.1 TP16.1 TP17.1 TP18.1 U1.17 U5.7 U5.9 | length 21.1
  Layer 1 - Top Layer w0.254: 59.067,38.342 U1.17@61.307,38.342 61.319,38.354 v1(63.5,38.354)
  Layer 1 - Top Layer w0.508: v1(55.245,40.894) C24.2@56.007,40.894 56.769,40.894 57.023,41.148 C23.2@57.277,41.148 v1(58.039,41.148) ; v1(59.563,30.099) C25.1@59.563,31.242 ; C26.2@59.779,33.02 v1(59.779,33.782)
  Layer 4 - Bottom Layer w0.254: v2(14.097,28.702) 14.422,29.027 14.422,29.652 14.422,31.529 C57.1@14.897,32.004
  Layer 4 - Bottom Layer w0.508: v1(53.34,19.288) R29.1@54.737,19.288 ; v1(58.928,5.677) R20.2@59.817,5.677 ; C20.2@61.214,5.677 v1(62.103,5.677) ; v1(64.77,19.393) R26.1@66.167,19.393 ; v1(71.12,27.416) R91.1@72.517,27.416 ; D12.2@74.676,73.801 v1(74.676,74.549) ; D11.2@75.946,91.68 v1(75.946,92.456) ; D10.2@82.423,79.234 v1(82.423,80.01)
  other v1: 2.235,1.168 7.315,1.168 12.395,1.168 17.475,1.168 22.555,1.168 27.635,1.168 32.715,1.168 37.795,1.168 42.875,1.168 53.035,1.168 63.195,1.168 4.775,6.248 9.855,6.248 35.255,6.248 40.335,6.248 45.415,6.248 42.875,11.328 47.955,11.328 53.035,11.328 58.115,11.328 0.508,16.002 55.575,16.408 0.508,17.018 12.395,21.488 17.475,21.488 22.555,21.488 27.635,21.488 32.715,21.488 58.115,21.488 35.255,26.568 55.575,26.568 15.748,28.321 15.748,29.083 71.882,31.115 72.644,31.115 73.355,31.648 71.882,31.877 72.644,31.877 74.422,36.449 40.335,36.728 74.422,37.211 74.422,37.973 74.422,38.735 83.515,41.808 29.21,50.546 29.21,51.308 27.635,51.968 29.21,52.07 40.335,67.208 70.815,67.208 75.895,67.208 20.828,68.834 20.828,69.596 20.828,70.358 22.479,70.739 22.479,71.501 22.479,72.263 2.235,72.288 9.855,77.368 14.935,77.368 16.002,81.026 16.764,81.026 16.002,81.788 16.764,81.788 83.515,82.448 16.002,82.55 16.764,82.55 16.002,83.82 16.764,83.82 16.002,85.09 16.764,85.09 80.975,87.528
  other v2: 14.097,27.752 13.147,28.702 15.047,28.702 14.097,29.652
VUSB: C60.1 J27.2 R119.2 U11.66 | length 19
  Layer 1 - Top Layer w0.254: U11.66@111.5,22.642 112.486,22.642 112.776,22.352 112.776,21.906 113.05,21.632
  Layer 1 - Top Layer w0.508: R119.2@110.201,7.366 110.201,9.744 114.554,14.097 J27.2@114.554,15.494 114.554,18.577 113.7,19.431 C60.1@113.7,21.082 113.6,21.082 113.05,21.632
pads on no net: D13.2 FID1.1 FID2.1 FID3.1 FID4.1 FID5.1 FID6.1 H1.0 H2.0 H3.0 H4.0 J17.4 J26.4 J29.1 S3.MH1 S3.MH2 S3.MP1 S3.MP2 S3.MP3 S3.MP4 SH-J1.0 SH-J2.0 SH-J3.0 SH-J4.0 SH-J5.0 SH-J6.0 SH-J7.0 SH-J8.0 SH-J9.0 SH-J10.0 SH-J11.0 SH-J12.0 SH-J13.0 SH-J14.0 SH-J15.0 SH-J16.0 SH-J17.0 SH-J18.0 SH-J19.0 SH-J20.0 SH-J21.0 U1.19 U1.44 U6.1S U6.2S U7.1S U7.2S U8.1S U8.2S U9.1S U9.2S U11.1 U11.2 U11.3 U11.4 U11.5 U11.6 U11.7 U11.8 U11.9 U11.10 U11.12 U11.13 U11.28 U11.30 U11.31 U11.32 U11.33 U11.34 U11.35 U11.37 U11.38 U11.42 U11.43 U11.44 U11.45 U11.46 U11.55 U11.56 U11.72 U11.73 U11.74 U11.75 U11.77 U11.78 U11.79 U11.80 U12.1S U12.2S U13.1S U13.2S U14.4 U15.1S U15.2S U16.1S U16.2S

## Polygon pours and split planes (outlines as drawn)
VSS on Layer 3 - Signal "Layer 3 - PWR - VSS" (solid, remove dead copper, pour order 10): 0,0 65.786,0 65.786,23.368 90.17,23.368 90.17,35.306 98.552,35.306 98.552,96.139 86.36,96.139 86.36,98.171 81.788,98.171 81.788,96.012 71.628,96.012 71.628,98.171 68.961,98.171 68.961,96.139 68.961,70.231 64.389,65.659 49.784,51.054 49.784,50.292 49.784,41.656 49.276,41.148 49.022,40.894 49.022,39.497 49.022,36.83 41.021,36.83 39.243,38.608 36.83,41.021 36.83,43.561 36.83,55.245 57.023,75.438 57.023,80.264 57.023,98.298 36.576,98.298 36.576,100.457 36.576,100.584 0,100.584
PGND on Layer 3 - Signal "Layer 3 - PWR - PGND" (solid, remove dead copper, pour order 12): 46.482,37.592 41.402,37.592 40.513,38.481 37.592,41.402 37.592,46.355 37.592,55.245 43.815,61.468 57.531,75.184 57.531,97.282 57.531,98.679 37.084,98.679 37.084,100.584 124.714,100.584 124.714,56.007 113.792,56.007 113.792,83.185 99.06,83.185 99.06,98.679 68.199,98.679 68.199,70.739 48.26,50.8 48.26,37.592
3.3V on Layer 3 - Signal "Layer 3 - PWR - 3.3V" (solid, remove dead copper, pour order 26): 82.042,0.254 124.46,0.254 124.46,52.832 100.076,52.832 100.076,35.56 101.473,34.163 102.997,34.163 105.03,32.13 105.03,29.845 105.03,18.987 102.425,16.383 102.425,11.239 99.949,8.763 91.821,8.763 82.042,8.763
PGND on Layer 2 - GND "Layer 2 - GND - PGND" (solid, remove dead copper, pour order 2): 46.482,37.592 41.402,37.592 40.513,38.481 37.592,41.402 37.592,46.355 37.592,55.245 43.815,61.468 57.531,75.184 57.531,97.282 57.531,98.679 37.084,98.679 37.084,100.584 124.714,100.584 124.714,56.007 113.792,56.007 113.792,83.185 99.06,83.185 99.06,98.679 68.199,98.679 68.199,70.739 48.26,50.8 48.26,37.592
QGND on Layer 2 - GND "Layer 2 - GND - QGND" (solid, remove dead copper, pour order 6): 124.587,55.245 113.03,55.245 113.03,82.423 99.314,82.423 99.314,34.544 90.932,34.544 90.932,22.606 66.294,22.606 66.294,0 124.714,0 124.714,55.245
VSS on Layer 2 - GND "Layer 2 - GND - VSS" (solid, remove dead copper, pour order 8): 0,0 65.786,0 65.786,23.368 90.17,23.368 90.17,35.306 98.552,35.306 98.552,96.139 86.36,96.139 86.36,98.171 81.788,98.171 81.788,96.012 71.628,96.012 71.628,98.171 68.961,98.171 68.961,96.139 68.961,70.231 64.389,65.659 49.784,51.054 49.784,50.292 49.784,41.656 49.276,41.148 49.022,40.894 49.022,39.497 49.022,36.83 41.021,36.83 39.243,38.608 36.83,41.021 36.83,43.561 36.83,55.245 57.023,75.438 57.023,80.264 57.023,98.298 36.576,98.298 36.576,100.457 36.576,100.584 0,100.584
VSS on Layer 1 - Top Layer "Layer 1 - Top Layer - VSS" (solid, remove dead copper, pour order 14): 0,0 65.786,0 65.786,23.368 90.17,23.368 90.17,35.306 98.552,35.306 98.552,96.139 86.36,96.139 86.36,98.171 81.788,98.171 81.788,96.012 71.628,96.012 71.628,98.171 68.961,98.171 68.961,96.139 68.961,70.231 64.389,65.659 49.784,51.054 49.784,50.292 49.784,41.656 49.276,41.148 49.022,40.894 49.022,39.497 49.022,36.83 41.021,36.83 39.243,38.608 36.83,41.021 36.83,43.561 36.83,55.245 57.023,75.438 57.023,80.264 57.023,98.298 36.576,98.298 36.576,100.457 36.576,100.584 0,100.584
PGND on Layer 1 - Top Layer "Layer 1 - Top Layer - PGND" (solid, remove dead copper, pour order 16): 46.482,37.592 41.402,37.592 40.513,38.481 37.592,41.402 37.592,46.355 37.592,55.245 43.815,61.468 57.531,75.184 57.531,97.282 57.531,98.679 37.084,98.679 37.084,100.584 124.714,100.584 124.714,56.007 113.792,56.007 113.792,83.185 99.06,83.185 99.06,98.679 68.199,98.679 68.199,70.739 48.26,50.8 48.26,37.592
QGND on Layer 1 - Top Layer "Layer 1 - Top Layer - QGND" (solid, remove dead copper, pour order 18): 124.587,55.245 113.03,55.245 113.03,82.423 99.314,82.423 99.314,34.544 90.932,34.544 90.932,22.606 66.294,22.606 66.294,0 124.714,0 124.714,55.245
QGND on Layer 4 - Bottom Layer "Layer 4 - Bottom Layer - QGND" (solid, remove dead copper, pour order 20): 124.587,55.245 113.03,55.245 113.03,82.423 99.314,82.423 99.314,34.544 90.932,34.544 90.932,22.606 66.294,22.606 66.294,0 124.714,0 124.714,55.245
PGND on Layer 4 - Bottom Layer "Layer 4 - Bottom Layer - PGND" (solid, remove dead copper, pour order 22): 46.482,37.592 41.402,37.592 40.513,38.481 37.592,41.402 37.592,46.355 37.592,55.245 43.815,61.468 57.531,75.184 57.531,97.282 57.531,98.679 37.084,98.679 37.084,100.584 124.714,100.584 124.714,56.007 113.792,56.007 113.792,83.185 99.06,83.185 99.06,98.679 68.199,98.679 68.199,70.739 48.26,50.8 48.26,37.592
VSS on Layer 4 - Bottom Layer "Layer 4 - Bottom Layer - VSS" (solid, remove dead copper, pour order 24): 0,0 65.786,0 65.786,23.368 90.17,23.368 90.17,35.306 98.552,35.306 98.552,96.139 86.36,96.139 86.36,98.171 81.788,98.171 81.788,96.012 71.628,96.012 71.628,98.171 68.961,98.171 68.961,96.139 68.961,70.231 64.389,65.659 49.784,51.054 49.784,50.292 49.784,41.656 49.276,41.148 49.022,40.894 49.022,39.497 49.022,36.83 41.021,36.83 39.243,38.608 36.83,41.021 36.83,43.561 36.83,55.245 57.023,75.438 57.023,80.264 57.023,98.298 36.576,98.298 36.576,100.457 36.576,100.584 0,100.584